# EAGLE board Qwiic_Hall_Effect_Sensor_TMAG5273-Panel (EAGLE 9.6.2), part 1 of 2
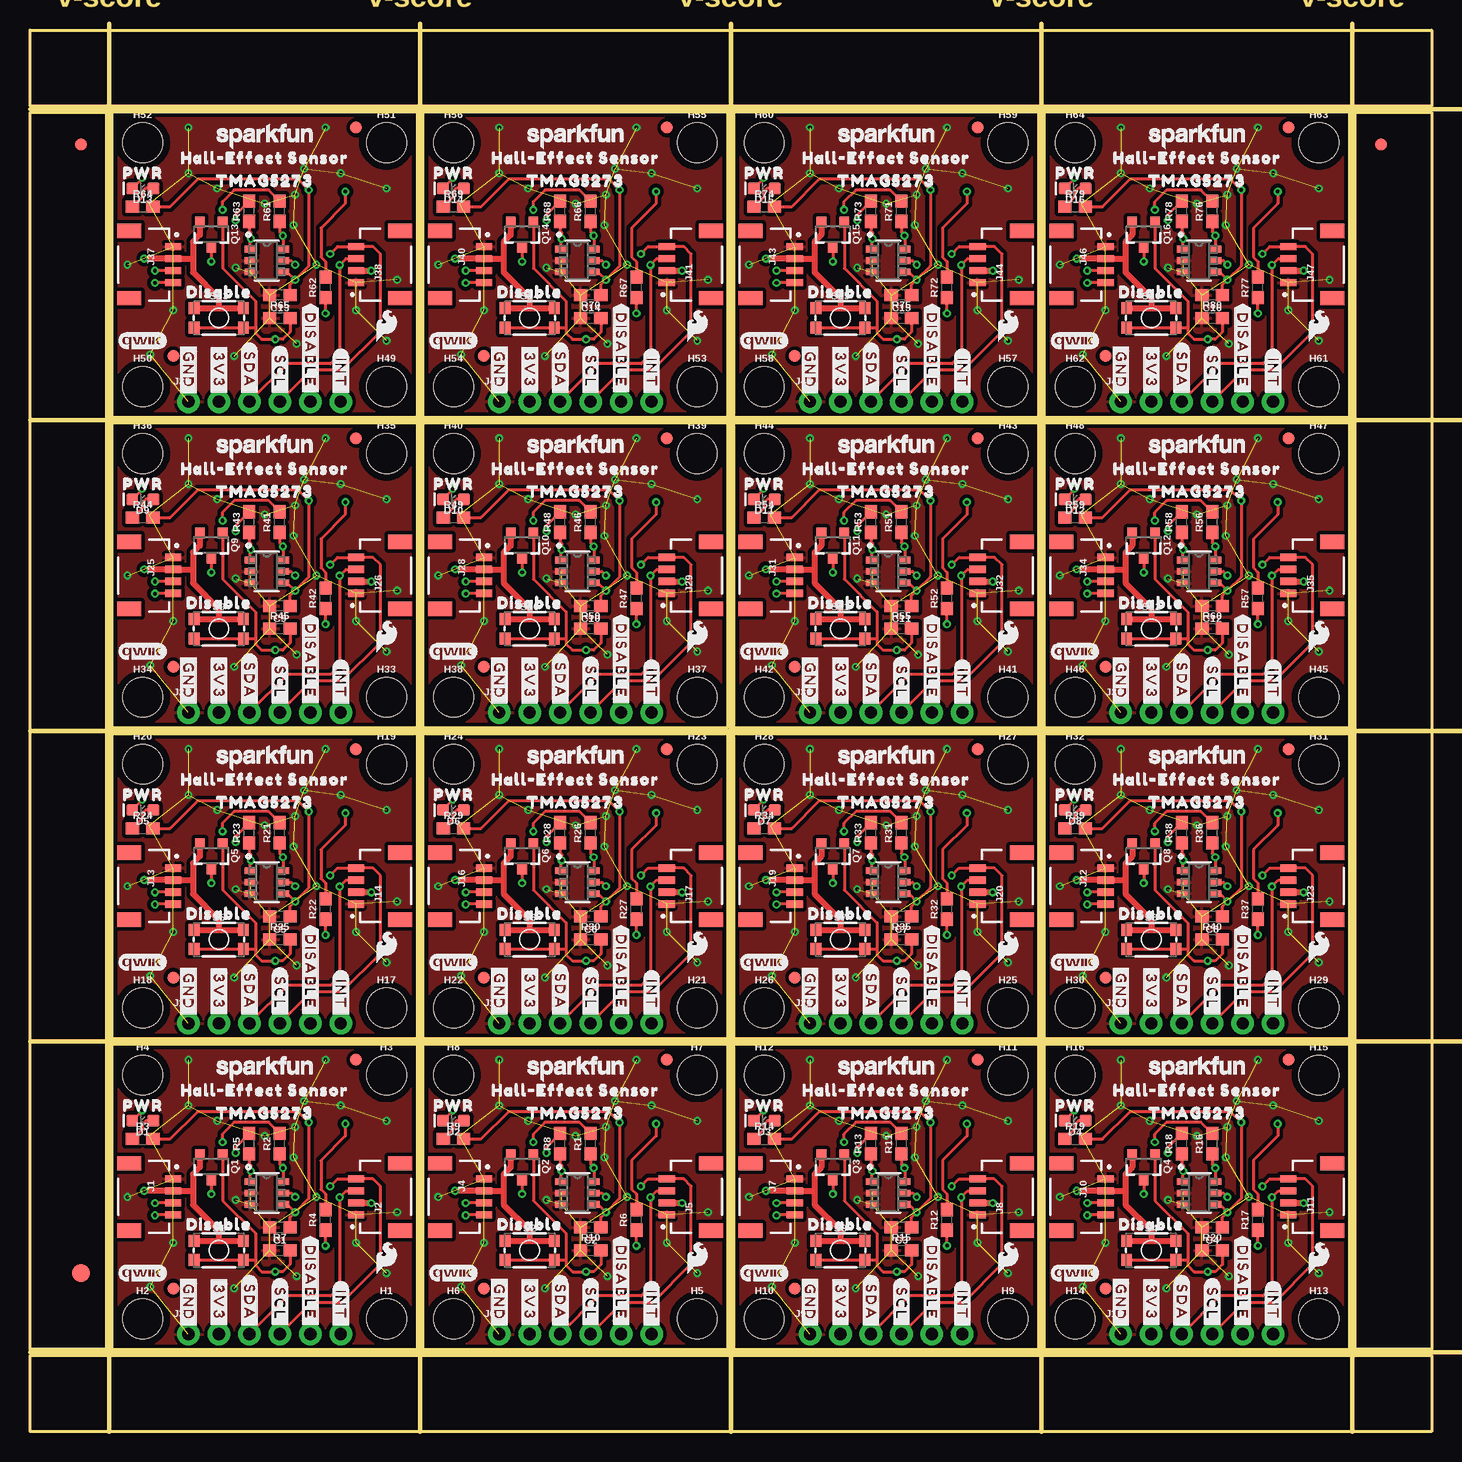
[diagram p0: board, top side]
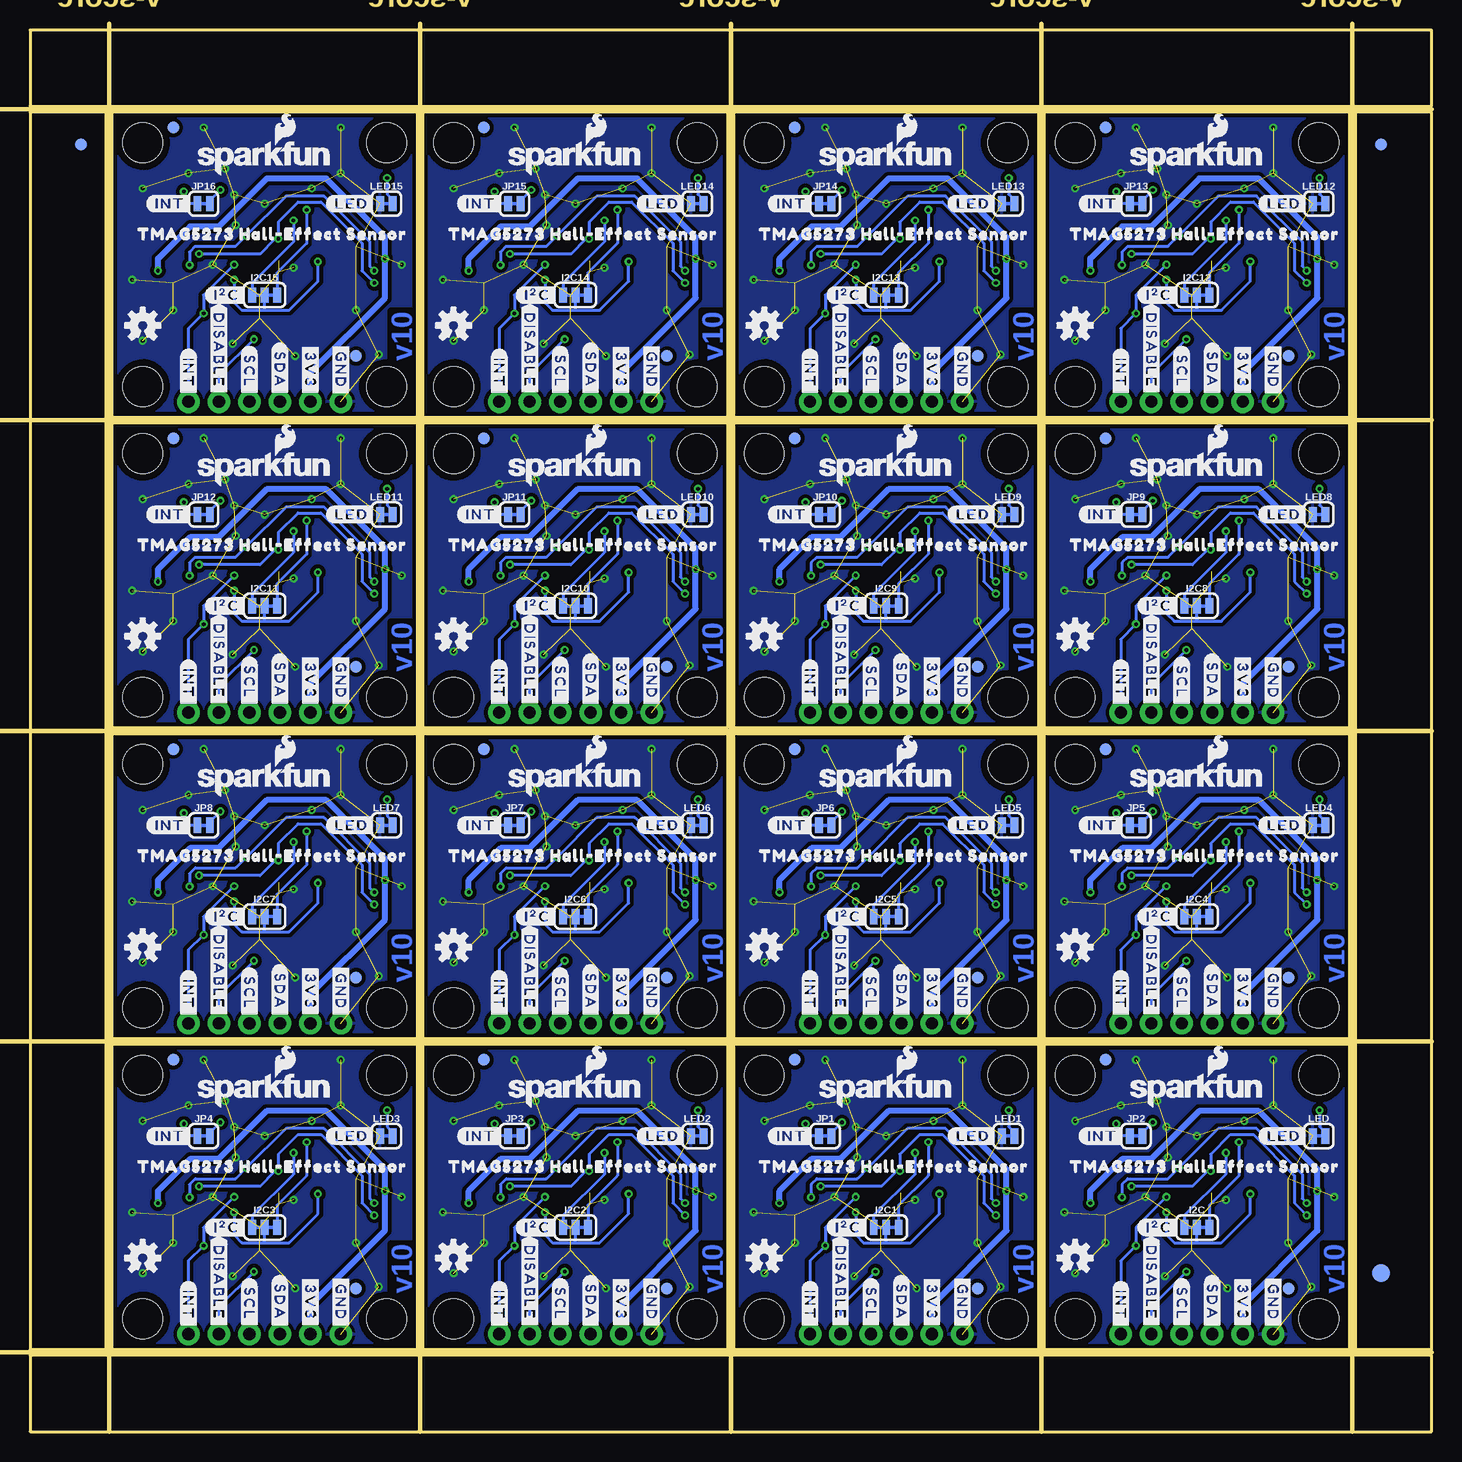
[diagram p1: board, bottom side, seen from below]

Size 116.84 x 116.84 mm. Coordinates in mm from the lower left corner, seen from the top.
Outline: 6.86,6.86 32.26,6.86 32.26,32.26 6.86,32.26 6.86,6.86
Outline: 32.77,6.86 58.17,6.86 58.17,32.26 32.77,32.26 32.77,6.86
Outline: 58.67,6.86 84.07,6.86 84.07,32.26 58.67,32.26 58.67,6.86
Outline: 84.58,6.86 109.98,6.86 109.98,32.26 84.58,32.26 84.58,6.86
Outline: 6.86,32.77 32.26,32.77 32.26,58.17 6.86,58.17 6.86,32.77
Outline: 32.77,32.77 58.17,32.77 58.17,58.17 32.77,58.17 32.77,32.77
Outline: 58.67,32.77 84.07,32.77 84.07,58.17 58.67,58.17 58.67,32.77
Outline: 84.58,32.77 109.98,32.77 109.98,58.17 84.58,58.17 84.58,32.77
Outline: 6.86,58.67 32.26,58.67 32.26,84.07 6.86,84.07 6.86,58.67
Outline: 32.77,58.67 58.17,58.67 58.17,84.07 32.77,84.07 32.77,58.67
Outline: 58.67,58.67 84.07,58.67 84.07,84.07 58.67,84.07 58.67,58.67
Outline: 84.58,58.67 109.98,58.67 109.98,84.07 84.58,84.07 84.58,58.67
Outline: 6.86,84.58 32.26,84.58 32.26,109.98 6.86,109.98 6.86,84.58
Outline: 32.77,84.58 58.17,84.58 58.17,109.98 32.77,109.98 32.77,84.58
Outline: 58.67,84.58 84.07,84.58 84.07,109.98 58.67,109.98 58.67,84.58
Outline: 84.58,84.58 109.98,84.58 109.98,109.98 84.58,109.98 84.58,84.58
Outline: 0,6.35 116.84,6.35 116.84,0 0,0 0,6.35
Outline: 110.49,109.98 116.84,109.98 116.84,6.86 110.49,6.86 110.49,109.98
Outline: 0,116.84 116.84,116.84 116.84,110.49 0,110.49 0,116.84
Outline: 0,109.98 6.35,109.98 6.35,6.86 0,6.86 0,109.98
Copper layers (1*16): Top 0.035mm / dielectric 1.5mm / Bottom 0.035mm
Design rules "Qwiic_Hall_Effect_Sensor_TMAG5273": minimum track width 7mil, minimum drill 0.3mm, track to track 7mil, track to pad 7mil, pad to pad 7mil, via to via 7mil, smd to smd 7mil, copper to edge 7mil, drill to drill 7mil, minimum pad ring 7mil, minimum via ring 7mil, stop-mask expansion 3mil, vias tented up to drill 25mil, thermal gap 10mil
Milling: 10 lines

## Footprints (pad centres in the part's own frame; a part is rotated, then mirrored left to right if it is on the bottom)
0603 = smd 1.1 x 1: 1 -0.85,0; 2 0.85,0
LED-0603 = smd 1 x 1: A -0.877,0; C 0.877,0
FIDUCIAL-1X2 = smd 1 x 1: 1 0,0
FIDUCIAL-1.5X3 = smd 1.5 x 1.5: 1 0,0
STAND-OFF = hole 3.302: 0,0
SMT-JUMPER_3_2-NC_TRACE_SILK = smd 0.66 x 1.27: 1 -1.041,0; 2 0,0; 3 1.041,0
JST04_1MM_RA = smd 0.6 x 1.35: 1 -1.5,0; 2 -0.5,0; 3 0.5,0; 4 1.5,0 | smd 1.2 x 2: NC1 2.8,-3.675; NC2 -2.8,-3.675
1X06_NO_SILK = drill 1.016 pad 1.88: 1 0,0; 2 2.54,0; 3 5.08,0; 4 7.62,0; 5 10.16,0; 6 12.7,0
SMT-JUMPER_2_NC_TRACE_SILK = smd 0.66 x 1.27: 1 -0.521,0; 2 0.521,0
SOT23-3 = smd 0.8 x 0.9: 1 -0.95,-1; 2 0.95,-1; 3 0,1.1
TACTILE_SWITCH_SMD_4.6X2.8MM = smd 0.9 x 1: 1 -2.05,-0.8; 2 2.05,-0.8; 3 2.05,0.8; 4 -2.05,0.8
SOT23-6_DBV_TEX = smd 0.978 x 0.559: 1 -1.365,0.95; 2 -1.365,0; 3 -1.365,-0.95; 4 1.365,-0.95; 5 1.365,0; 6 1.365,0.95

## Placement (x,y rotation side)
C1  0.1uF  [0603]  20.83,17.02 180 top
C2  0.1uF  [0603]  46.74,17.02 180 top
C3  0.1uF  [0603]  72.64,17.02 180 top
C4  0.1uF  [0603]  98.55,17.02 180 top
C5  0.1uF  [0603]  20.83,42.93 180 top
C6  0.1uF  [0603]  46.74,42.93 180 top
C7  0.1uF  [0603]  72.64,42.93 180 top
C8  0.1uF  [0603]  98.55,42.93 180 top
C9  0.1uF  [0603]  20.83,68.83 180 top
C10  0.1uF  [0603]  46.74,68.83 180 top
C11  0.1uF  [0603]  72.64,68.83 180 top
C12  0.1uF  [0603]  98.55,68.83 180 top
C13  0.1uF  [0603]  20.83,94.74 180 top
C14  0.1uF  [0603]  46.74,94.74 180 top
C15  0.1uF  [0603]  72.64,94.74 180 top
C16  0.1uF  [0603]  98.55,94.74 180 top
D1  Red  [LED-0603]  9.4,25.91 180 top
D2  Red  [LED-0603]  35.31,25.91 180 top
D3  Red  [LED-0603]  61.21,25.91 180 top
D4  Red  [LED-0603]  87.12,25.91 180 top
D5  Red  [LED-0603]  9.4,51.82 180 top
D6  Red  [LED-0603]  35.31,51.82 180 top
D7  Red  [LED-0603]  61.21,51.82 180 top
D8  Red  [LED-0603]  87.12,51.82 180 top
D9  Red  [LED-0603]  9.4,77.72 180 top
D10  Red  [LED-0603]  35.31,77.72 180 top
D11  Red  [LED-0603]  61.21,77.72 180 top
D12  Red  [LED-0603]  87.12,77.72 180 top
D13  Red  [LED-0603]  9.4,103.63 180 top
D14  Red  [LED-0603]  35.31,103.63 180 top
D15  Red  [LED-0603]  61.21,103.63 180 top
D16  Red  [LED-0603]  87.12,103.63 180 top
E$1  [FIDUCIAL-1X2]  4.23,107.31 0 top
E$2  [FIDUCIAL-1X2]  4.23,107.31 0 bottom
E$3  [FIDUCIAL-1X2]  112.61,107.31 0 top
E$4  [FIDUCIAL-1X2]  112.61,107.31 0 bottom
E$5  [FIDUCIAL-1.5X3]  4.23,13.21 0 top
E$6  [FIDUCIAL-1.5X3]  4.23,13.21 0 bottom
FD1  FIDUCIAL1X2  [FIDUCIAL-1X2]  11.94,11.94 0 bottom
FD2  FIDUCIAL1X2  [FIDUCIAL-1X2]  11.94,11.94 0 top
FD3  FIDUCIAL1X2  [FIDUCIAL-1X2]  27.18,30.99 0 bottom
FD4  FIDUCIAL1X2  [FIDUCIAL-1X2]  27.18,30.99 0 top
FD5  FIDUCIAL1X2  [FIDUCIAL-1X2]  37.85,11.94 0 bottom
FD6  FIDUCIAL1X2  [FIDUCIAL-1X2]  37.85,11.94 0 top
FD7  FIDUCIAL1X2  [FIDUCIAL-1X2]  53.09,30.99 0 bottom
FD8  FIDUCIAL1X2  [FIDUCIAL-1X2]  53.09,30.99 0 top
FD9  FIDUCIAL1X2  [FIDUCIAL-1X2]  63.75,11.94 0 bottom
FD10  FIDUCIAL1X2  [FIDUCIAL-1X2]  63.75,11.94 0 top
FD11  FIDUCIAL1X2  [FIDUCIAL-1X2]  78.99,30.99 0 bottom
FD12  FIDUCIAL1X2  [FIDUCIAL-1X2]  78.99,30.99 0 top
FD13  FIDUCIAL1X2  [FIDUCIAL-1X2]  89.66,11.94 0 bottom
FD14  FIDUCIAL1X2  [FIDUCIAL-1X2]  89.66,11.94 0 top
FD15  FIDUCIAL1X2  [FIDUCIAL-1X2]  104.9,30.99 0 bottom
FD16  FIDUCIAL1X2  [FIDUCIAL-1X2]  104.9,30.99 0 top
FD17  FIDUCIAL1X2  [FIDUCIAL-1X2]  11.94,37.85 0 bottom
FD18  FIDUCIAL1X2  [FIDUCIAL-1X2]  11.94,37.85 0 top
FD19  FIDUCIAL1X2  [FIDUCIAL-1X2]  27.18,56.9 0 bottom
FD20  FIDUCIAL1X2  [FIDUCIAL-1X2]  27.18,56.9 0 top
FD21  FIDUCIAL1X2  [FIDUCIAL-1X2]  37.85,37.85 0 bottom
FD22  FIDUCIAL1X2  [FIDUCIAL-1X2]  37.85,37.85 0 top
FD23  FIDUCIAL1X2  [FIDUCIAL-1X2]  53.09,56.9 0 bottom
FD24  FIDUCIAL1X2  [FIDUCIAL-1X2]  53.09,56.9 0 top
FD25  FIDUCIAL1X2  [FIDUCIAL-1X2]  63.75,37.85 0 bottom
FD26  FIDUCIAL1X2  [FIDUCIAL-1X2]  63.75,37.85 0 top
FD27  FIDUCIAL1X2  [FIDUCIAL-1X2]  78.99,56.9 0 bottom
FD28  FIDUCIAL1X2  [FIDUCIAL-1X2]  78.99,56.9 0 top
FD29  FIDUCIAL1X2  [FIDUCIAL-1X2]  89.66,37.85 0 bottom
FD30  FIDUCIAL1X2  [FIDUCIAL-1X2]  89.66,37.85 0 top
FD31  FIDUCIAL1X2  [FIDUCIAL-1X2]  104.9,56.9 0 bottom
FD32  FIDUCIAL1X2  [FIDUCIAL-1X2]  104.9,56.9 0 top
FD33  FIDUCIAL1X2  [FIDUCIAL-1X2]  11.94,63.75 0 bottom
FD34  FIDUCIAL1X2  [FIDUCIAL-1X2]  11.94,63.75 0 top
FD35  FIDUCIAL1X2  [FIDUCIAL-1X2]  27.18,82.8 0 bottom
FD36  FIDUCIAL1X2  [FIDUCIAL-1X2]  27.18,82.8 0 top
FD37  FIDUCIAL1X2  [FIDUCIAL-1X2]  37.85,63.75 0 bottom
FD38  FIDUCIAL1X2  [FIDUCIAL-1X2]  37.85,63.75 0 top
FD39  FIDUCIAL1X2  [FIDUCIAL-1X2]  53.09,82.8 0 bottom
FD40  FIDUCIAL1X2  [FIDUCIAL-1X2]  53.09,82.8 0 top
FD41  FIDUCIAL1X2  [FIDUCIAL-1X2]  63.75,63.75 0 bottom
FD42  FIDUCIAL1X2  [FIDUCIAL-1X2]  63.75,63.75 0 top
FD43  FIDUCIAL1X2  [FIDUCIAL-1X2]  78.99,82.8 0 bottom
FD44  FIDUCIAL1X2  [FIDUCIAL-1X2]  78.99,82.8 0 top
FD45  FIDUCIAL1X2  [FIDUCIAL-1X2]  89.66,63.75 0 bottom
FD46  FIDUCIAL1X2  [FIDUCIAL-1X2]  89.66,63.75 0 top
FD47  FIDUCIAL1X2  [FIDUCIAL-1X2]  104.9,82.8 0 bottom
FD48  FIDUCIAL1X2  [FIDUCIAL-1X2]  104.9,82.8 0 top
FD49  FIDUCIAL1X2  [FIDUCIAL-1X2]  11.94,89.66 0 bottom
FD50  FIDUCIAL1X2  [FIDUCIAL-1X2]  11.94,89.66 0 top
FD51  FIDUCIAL1X2  [FIDUCIAL-1X2]  27.18,108.71 0 bottom
FD52  FIDUCIAL1X2  [FIDUCIAL-1X2]  27.18,108.71 0 top
FD53  FIDUCIAL1X2  [FIDUCIAL-1X2]  37.85,89.66 0 bottom
FD54  FIDUCIAL1X2  [FIDUCIAL-1X2]  37.85,89.66 0 top
FD55  FIDUCIAL1X2  [FIDUCIAL-1X2]  53.09,108.71 0 bottom
FD56  FIDUCIAL1X2  [FIDUCIAL-1X2]  53.09,108.71 0 top
FD57  FIDUCIAL1X2  [FIDUCIAL-1X2]  63.75,89.66 0 bottom
FD58  FIDUCIAL1X2  [FIDUCIAL-1X2]  63.75,89.66 0 top
FD59  FIDUCIAL1X2  [FIDUCIAL-1X2]  78.99,108.71 0 bottom
FD60  FIDUCIAL1X2  [FIDUCIAL-1X2]  78.99,108.71 0 top
FD61  FIDUCIAL1X2  [FIDUCIAL-1X2]  89.66,89.66 0 bottom
FD62  FIDUCIAL1X2  [FIDUCIAL-1X2]  89.66,89.66 0 top
FD63  FIDUCIAL1X2  [FIDUCIAL-1X2]  104.9,108.71 0 bottom
FD64  FIDUCIAL1X2  [FIDUCIAL-1X2]  104.9,108.71 0 top
H1  STAND-OFF  [STAND-OFF]  29.72,9.4 0 top
H2  STAND-OFF  [STAND-OFF]  9.4,9.4 0 top
H3  STAND-OFF  [STAND-OFF]  29.72,29.72 0 top
H4  STAND-OFF  [STAND-OFF]  9.4,29.72 0 top
H5  STAND-OFF  [STAND-OFF]  55.63,9.4 0 top
H6  STAND-OFF  [STAND-OFF]  35.31,9.4 0 top
H7  STAND-OFF  [STAND-OFF]  55.63,29.72 0 top
H8  STAND-OFF  [STAND-OFF]  35.31,29.72 0 top
H9  STAND-OFF  [STAND-OFF]  81.53,9.4 0 top
H10  STAND-OFF  [STAND-OFF]  61.21,9.4 0 top
H11  STAND-OFF  [STAND-OFF]  81.53,29.72 0 top
H12  STAND-OFF  [STAND-OFF]  61.21,29.72 0 top
H13  STAND-OFF  [STAND-OFF]  107.44,9.4 0 top
H14  STAND-OFF  [STAND-OFF]  87.12,9.4 0 top
H15  STAND-OFF  [STAND-OFF]  107.44,29.72 0 top
H16  STAND-OFF  [STAND-OFF]  87.12,29.72 0 top
H17  STAND-OFF  [STAND-OFF]  29.72,35.31 0 top
H18  STAND-OFF  [STAND-OFF]  9.4,35.31 0 top
H19  STAND-OFF  [STAND-OFF]  29.72,55.63 0 top
H20  STAND-OFF  [STAND-OFF]  9.4,55.63 0 top
H21  STAND-OFF  [STAND-OFF]  55.63,35.31 0 top
H22  STAND-OFF  [STAND-OFF]  35.31,35.31 0 top
H23  STAND-OFF  [STAND-OFF]  55.63,55.63 0 top
H24  STAND-OFF  [STAND-OFF]  35.31,55.63 0 top
H25  STAND-OFF  [STAND-OFF]  81.53,35.31 0 top
H26  STAND-OFF  [STAND-OFF]  61.21,35.31 0 top
H27  STAND-OFF  [STAND-OFF]  81.53,55.63 0 top
H28  STAND-OFF  [STAND-OFF]  61.21,55.63 0 top
H29  STAND-OFF  [STAND-OFF]  107.44,35.31 0 top
H30  STAND-OFF  [STAND-OFF]  87.12,35.31 0 top
H31  STAND-OFF  [STAND-OFF]  107.44,55.63 0 top
H32  STAND-OFF  [STAND-OFF]  87.12,55.63 0 top
H33  STAND-OFF  [STAND-OFF]  29.72,61.21 0 top
H34  STAND-OFF  [STAND-OFF]  9.4,61.21 0 top
H35  STAND-OFF  [STAND-OFF]  29.72,81.53 0 top
H36  STAND-OFF  [STAND-OFF]  9.4,81.53 0 top
H37  STAND-OFF  [STAND-OFF]  55.63,61.21 0 top
H38  STAND-OFF  [STAND-OFF]  35.31,61.21 0 top
H39  STAND-OFF  [STAND-OFF]  55.63,81.53 0 top
H40  STAND-OFF  [STAND-OFF]  35.31,81.53 0 top
H41  STAND-OFF  [STAND-OFF]  81.53,61.21 0 top
H42  STAND-OFF  [STAND-OFF]  61.21,61.21 0 top
H43  STAND-OFF  [STAND-OFF]  81.53,81.53 0 top
H44  STAND-OFF  [STAND-OFF]  61.21,81.53 0 top
H45  STAND-OFF  [STAND-OFF]  107.44,61.21 0 top
H46  STAND-OFF  [STAND-OFF]  87.12,61.21 0 top
H47  STAND-OFF  [STAND-OFF]  107.44,81.53 0 top
H48  STAND-OFF  [STAND-OFF]  87.12,81.53 0 top
H49  STAND-OFF  [STAND-OFF]  29.72,87.12 0 top
H50  STAND-OFF  [STAND-OFF]  9.4,87.12 0 top
H51  STAND-OFF  [STAND-OFF]  29.72,107.44 0 top
H52  STAND-OFF  [STAND-OFF]  9.4,107.44 0 top
H53  STAND-OFF  [STAND-OFF]  55.63,87.12 0 top
H54  STAND-OFF  [STAND-OFF]  35.31,87.12 0 top
H55  STAND-OFF  [STAND-OFF]  55.63,107.44 0 top
H56  STAND-OFF  [STAND-OFF]  35.31,107.44 0 top
H57  STAND-OFF  [STAND-OFF]  81.53,87.12 0 top
H58  STAND-OFF  [STAND-OFF]  61.21,87.12 0 top
H59  STAND-OFF  [STAND-OFF]  81.53,107.44 0 top
H60  STAND-OFF  [STAND-OFF]  61.21,107.44 0 top
H61  STAND-OFF  [STAND-OFF]  107.44,87.12 0 top
H62  STAND-OFF  [STAND-OFF]  87.12,87.12 0 top
H63  STAND-OFF  [STAND-OFF]  107.44,107.44 0 top
H64  STAND-OFF  [STAND-OFF]  87.12,107.44 0 top
I2C  JUMPER-SMT_3_2-NC_TRACE_SILK  [SMT-JUMPER_3_2-NC_TRACE_SILK]  19.56,17.02 0 bottom
I2C1  JUMPER-SMT_3_2-NC_TRACE_SILK  [SMT-JUMPER_3_2-NC_TRACE_SILK]  45.47,17.02 0 bottom
I2C2  JUMPER-SMT_3_2-NC_TRACE_SILK  [SMT-JUMPER_3_2-NC_TRACE_SILK]  71.37,17.02 0 bottom
I2C3  JUMPER-SMT_3_2-NC_TRACE_SILK  [SMT-JUMPER_3_2-NC_TRACE_SILK]  97.28,17.02 0 bottom
I2C4  JUMPER-SMT_3_2-NC_TRACE_SILK  [SMT-JUMPER_3_2-NC_TRACE_SILK]  19.56,42.93 0 bottom
I2C5  JUMPER-SMT_3_2-NC_TRACE_SILK  [SMT-JUMPER_3_2-NC_TRACE_SILK]  45.47,42.93 0 bottom
I2C6  JUMPER-SMT_3_2-NC_TRACE_SILK  [SMT-JUMPER_3_2-NC_TRACE_SILK]  71.37,42.93 0 bottom
I2C7  JUMPER-SMT_3_2-NC_TRACE_SILK  [SMT-JUMPER_3_2-NC_TRACE_SILK]  97.28,42.93 0 bottom
I2C8  JUMPER-SMT_3_2-NC_TRACE_SILK  [SMT-JUMPER_3_2-NC_TRACE_SILK]  19.56,68.83 0 bottom
I2C9  JUMPER-SMT_3_2-NC_TRACE_SILK  [SMT-JUMPER_3_2-NC_TRACE_SILK]  45.47,68.83 0 bottom
I2C10  JUMPER-SMT_3_2-NC_TRACE_SILK  [SMT-JUMPER_3_2-NC_TRACE_SILK]  71.37,68.83 0 bottom
I2C11  JUMPER-SMT_3_2-NC_TRACE_SILK  [SMT-JUMPER_3_2-NC_TRACE_SILK]  97.28,68.83 0 bottom
I2C12  JUMPER-SMT_3_2-NC_TRACE_SILK  [SMT-JUMPER_3_2-NC_TRACE_SILK]  19.56,94.74 0 bottom
I2C13  JUMPER-SMT_3_2-NC_TRACE_SILK  [SMT-JUMPER_3_2-NC_TRACE_SILK]  45.47,94.74 0 bottom
I2C14  JUMPER-SMT_3_2-NC_TRACE_SILK  [SMT-JUMPER_3_2-NC_TRACE_SILK]  71.37,94.74 0 bottom
I2C15  JUMPER-SMT_3_2-NC_TRACE_SILK  [SMT-JUMPER_3_2-NC_TRACE_SILK]  97.28,94.74 0 bottom
J1  QWIIC_RIGHT_ANGLE  [JST04_1MM_RA]  11.94,19.56 270 top
J2  QWIIC_RIGHT_ANGLE  [JST04_1MM_RA]  27.18,19.56 90 top
J3  [1X06_NO_SILK]  13.21,8.13 0 top
J4  QWIIC_RIGHT_ANGLE  [JST04_1MM_RA]  37.85,19.56 270 top
J5  QWIIC_RIGHT_ANGLE  [JST04_1MM_RA]  53.09,19.56 90 top
J6  [1X06_NO_SILK]  39.12,8.13 0 top
J7  QWIIC_RIGHT_ANGLE  [JST04_1MM_RA]  63.75,19.56 270 top
J8  QWIIC_RIGHT_ANGLE  [JST04_1MM_RA]  78.99,19.56 90 top
J9  [1X06_NO_SILK]  65.02,8.13 0 top
J10  QWIIC_RIGHT_ANGLE  [JST04_1MM_RA]  89.66,19.56 270 top
J11  QWIIC_RIGHT_ANGLE  [JST04_1MM_RA]  104.9,19.56 90 top
J12  [1X06_NO_SILK]  90.93,8.13 0 top
J13  QWIIC_RIGHT_ANGLE  [JST04_1MM_RA]  11.94,45.47 270 top
J14  QWIIC_RIGHT_ANGLE  [JST04_1MM_RA]  27.18,45.47 90 top
J15  [1X06_NO_SILK]  13.21,34.04 0 top
J16  QWIIC_RIGHT_ANGLE  [JST04_1MM_RA]  37.85,45.47 270 top
J17  QWIIC_RIGHT_ANGLE  [JST04_1MM_RA]  53.09,45.47 90 top
J18  [1X06_NO_SILK]  39.12,34.04 0 top
J19  QWIIC_RIGHT_ANGLE  [JST04_1MM_RA]  63.75,45.47 270 top
J20  QWIIC_RIGHT_ANGLE  [JST04_1MM_RA]  78.99,45.47 90 top
J21  [1X06_NO_SILK]  65.02,34.04 0 top
J22  QWIIC_RIGHT_ANGLE  [JST04_1MM_RA]  89.66,45.47 270 top
J23  QWIIC_RIGHT_ANGLE  [JST04_1MM_RA]  104.9,45.47 90 top
J24  [1X06_NO_SILK]  90.93,34.04 0 top
J25  QWIIC_RIGHT_ANGLE  [JST04_1MM_RA]  11.94,71.37 270 top
J26  QWIIC_RIGHT_ANGLE  [JST04_1MM_RA]  27.18,71.37 90 top
J27  [1X06_NO_SILK]  13.21,59.94 0 top
J28  QWIIC_RIGHT_ANGLE  [JST04_1MM_RA]  37.85,71.37 270 top
J29  QWIIC_RIGHT_ANGLE  [JST04_1MM_RA]  53.09,71.37 90 top
J30  [1X06_NO_SILK]  39.12,59.94 0 top
J31  QWIIC_RIGHT_ANGLE  [JST04_1MM_RA]  63.75,71.37 270 top
J32  QWIIC_RIGHT_ANGLE  [JST04_1MM_RA]  78.99,71.37 90 top
J33  [1X06_NO_SILK]  65.02,59.94 0 top
J34  QWIIC_RIGHT_ANGLE  [JST04_1MM_RA]  89.66,71.37 270 top
J35  QWIIC_RIGHT_ANGLE  [JST04_1MM_RA]  104.9,71.37 90 top
J36  [1X06_NO_SILK]  90.93,59.94 0 top
J37  QWIIC_RIGHT_ANGLE  [JST04_1MM_RA]  11.94,97.28 270 top
J38  QWIIC_RIGHT_ANGLE  [JST04_1MM_RA]  27.18,97.28 90 top
J39  [1X06_NO_SILK]  13.21,85.85 0 top
J40  QWIIC_RIGHT_ANGLE  [JST04_1MM_RA]  37.85,97.28 270 top
J41  QWIIC_RIGHT_ANGLE  [JST04_1MM_RA]  53.09,97.28 90 top
J42  [1X06_NO_SILK]  39.12,85.85 0 top
J43  QWIIC_RIGHT_ANGLE  [JST04_1MM_RA]  63.75,97.28 270 top
J44  QWIIC_RIGHT_ANGLE  [JST04_1MM_RA]  78.99,97.28 90 top
J45  [1X06_NO_SILK]  65.02,85.85 0 top
J46  QWIIC_RIGHT_ANGLE  [JST04_1MM_RA]  89.66,97.28 270 top
J47  QWIIC_RIGHT_ANGLE  [JST04_1MM_RA]  104.9,97.28 90 top
J48  [1X06_NO_SILK]  90.93,85.85 0 top
JP1  JUMPER-SMT_2_NC_TRACE_SILK  [SMT-JUMPER_2_NC_TRACE_SILK]  50.55,24.64 0 bottom
JP2  JUMPER-SMT_2_NC_TRACE_SILK  [SMT-JUMPER_2_NC_TRACE_SILK]  24.64,24.64 0 bottom
JP3  JUMPER-SMT_2_NC_TRACE_SILK  [SMT-JUMPER_2_NC_TRACE_SILK]  76.45,24.64 0 bottom
JP4  JUMPER-SMT_2_NC_TRACE_SILK  [SMT-JUMPER_2_NC_TRACE_SILK]  102.36,24.64 0 bottom
JP5  JUMPER-SMT_2_NC_TRACE_SILK  [SMT-JUMPER_2_NC_TRACE_SILK]  24.64,50.55 0 bottom
JP6  JUMPER-SMT_2_NC_TRACE_SILK  [SMT-JUMPER_2_NC_TRACE_SILK]  50.55,50.55 0 bottom
JP7  JUMPER-SMT_2_NC_TRACE_SILK  [SMT-JUMPER_2_NC_TRACE_SILK]  76.45,50.55 0 bottom
JP8  JUMPER-SMT_2_NC_TRACE_SILK  [SMT-JUMPER_2_NC_TRACE_SILK]  102.36,50.55 0 bottom
JP9  JUMPER-SMT_2_NC_TRACE_SILK  [SMT-JUMPER_2_NC_TRACE_SILK]  24.64,76.45 0 bottom
JP10  JUMPER-SMT_2_NC_TRACE_SILK  [SMT-JUMPER_2_NC_TRACE_SILK]  50.55,76.45 0 bottom
JP11  JUMPER-SMT_2_NC_TRACE_SILK  [SMT-JUMPER_2_NC_TRACE_SILK]  76.45,76.45 0 bottom
JP12  JUMPER-SMT_2_NC_TRACE_SILK  [SMT-JUMPER_2_NC_TRACE_SILK]  102.36,76.45 0 bottom
JP13  JUMPER-SMT_2_NC_TRACE_SILK  [SMT-JUMPER_2_NC_TRACE_SILK]  24.64,102.36 0 bottom
JP14  JUMPER-SMT_2_NC_TRACE_SILK  [SMT-JUMPER_2_NC_TRACE_SILK]  50.55,102.36 0 bottom
JP15  JUMPER-SMT_2_NC_TRACE_SILK  [SMT-JUMPER_2_NC_TRACE_SILK]  76.45,102.36 0 bottom
JP16  JUMPER-SMT_2_NC_TRACE_SILK  [SMT-JUMPER_2_NC_TRACE_SILK]  102.36,102.36 0 bottom
LED  JUMPER-SMT_2_NC_TRACE_SILK  [SMT-JUMPER_2_NC_TRACE_SILK]  9.4,24.64 0 bottom
LED1  JUMPER-SMT_2_NC_TRACE_SILK  [SMT-JUMPER_2_NC_TRACE_SILK]  35.31,24.64 0 bottom
LED2  JUMPER-SMT_2_NC_TRACE_SILK  [SMT-JUMPER_2_NC_TRACE_SILK]  61.21,24.64 0 bottom
LED3  JUMPER-SMT_2_NC_TRACE_SILK  [SMT-JUMPER_2_NC_TRACE_SILK]  87.12,24.64 0 bottom
LED4  JUMPER-SMT_2_NC_TRACE_SILK  [SMT-JUMPER_2_NC_TRACE_SILK]  9.4,50.55 0 bottom
LED5  JUMPER-SMT_2_NC_TRACE_SILK  [SMT-JUMPER_2_NC_TRACE_SILK]  35.31,50.55 0 bottom
LED6  JUMPER-SMT_2_NC_TRACE_SILK  [SMT-JUMPER_2_NC_TRACE_SILK]  61.21,50.55 0 bottom
LED7  JUMPER-SMT_2_NC_TRACE_SILK  [SMT-JUMPER_2_NC_TRACE_SILK]  87.12,50.55 0 bottom
LED8  JUMPER-SMT_2_NC_TRACE_SILK  [SMT-JUMPER_2_NC_TRACE_SILK]  9.4,76.45 0 bottom
LED9  JUMPER-SMT_2_NC_TRACE_SILK  [SMT-JUMPER_2_NC_TRACE_SILK]  35.31,76.45 0 bottom
LED10  JUMPER-SMT_2_NC_TRACE_SILK  [SMT-JUMPER_2_NC_TRACE_SILK]  61.21,76.45 0 bottom
LED11  JUMPER-SMT_2_NC_TRACE_SILK  [SMT-JUMPER_2_NC_TRACE_SILK]  87.12,76.45 0 bottom
LED12  JUMPER-SMT_2_NC_TRACE_SILK  [SMT-JUMPER_2_NC_TRACE_SILK]  9.4,102.36 0 bottom
LED13  JUMPER-SMT_2_NC_TRACE_SILK  [SMT-JUMPER_2_NC_TRACE_SILK]  35.31,102.36 0 bottom
LED14  JUMPER-SMT_2_NC_TRACE_SILK  [SMT-JUMPER_2_NC_TRACE_SILK]  61.21,102.36 0 bottom
LED15  JUMPER-SMT_2_NC_TRACE_SILK  [SMT-JUMPER_2_NC_TRACE_SILK]  87.12,102.36 0 bottom
LOGO1  OSHW-LOGOS  [OSHW-LOGO-S]  29.72,14.48 0 bottom
LOGO2  SFE_LOGO_NAME_FLAME.1_INCH  [SFE_LOGO_NAME_FLAME_.1]  19.56,28.45 0 bottom
LOGO3  QWIIC_LOGO_4MM  [QWIIC_4MM]  9.4,13.21 0 top
LOGO4  SFE_LOGO_NAME8_MM  [SFE_LOGO_NAME_8MM]  19.56,30.35 0 top
LOGO5  OSHW-LOGOS  [OSHW-LOGO-S]  55.63,14.48 0 bottom
LOGO6  SFE_LOGO_FLAME.1_INCH  [SFE_LOGO_FLAME_.1]  29.72,14.48 0 top
LOGO7  SFE_LOGO_NAME_FLAME.1_INCH  [SFE_LOGO_NAME_FLAME_.1]  45.47,28.45 0 bottom
LOGO8  QWIIC_LOGO_4MM  [QWIIC_4MM]  35.31,13.21 0 top
LOGO9  SFE_LOGO_NAME8_MM  [SFE_LOGO_NAME_8MM]  45.47,30.35 0 top
LOGO10  SFE_LOGO_FLAME.1_INCH  [SFE_LOGO_FLAME_.1]  55.63,14.48 0 top
LOGO11  OSHW-LOGOS  [OSHW-LOGO-S]  81.53,14.48 0 bottom
LOGO12  SFE_LOGO_NAME_FLAME.1_INCH  [SFE_LOGO_NAME_FLAME_.1]  71.37,28.45 0 bottom
LOGO13  QWIIC_LOGO_4MM  [QWIIC_4MM]  61.21,13.21 0 top
LOGO14  SFE_LOGO_NAME8_MM  [SFE_LOGO_NAME_8MM]  71.37,30.35 0 top
LOGO15  SFE_LOGO_FLAME.1_INCH  [SFE_LOGO_FLAME_.1]  81.53,14.48 0 top
LOGO16  OSHW-LOGOS  [OSHW-LOGO-S]  107.44,14.48 0 bottom
LOGO17  SFE_LOGO_NAME_FLAME.1_INCH  [SFE_LOGO_NAME_FLAME_.1]  97.28,28.45 0 bottom
LOGO18  QWIIC_LOGO_4MM  [QWIIC_4MM]  87.12,13.21 0 top
LOGO19  SFE_LOGO_NAME8_MM  [SFE_LOGO_NAME_8MM]  97.28,30.35 0 top
LOGO20  SFE_LOGO_FLAME.1_INCH  [SFE_LOGO_FLAME_.1]  107.44,14.48 0 top
LOGO21  OSHW-LOGOS  [OSHW-LOGO-S]  29.72,40.39 0 bottom
LOGO22  SFE_LOGO_NAME_FLAME.1_INCH  [SFE_LOGO_NAME_FLAME_.1]  19.56,54.36 0 bottom
LOGO23  QWIIC_LOGO_4MM  [QWIIC_4MM]  9.4,39.12 0 top
LOGO24  SFE_LOGO_NAME8_MM  [SFE_LOGO_NAME_8MM]  19.56,56.26 0 top
LOGO25  SFE_LOGO_FLAME.1_INCH  [SFE_LOGO_FLAME_.1]  29.72,40.39 0 top
LOGO26  OSHW-LOGOS  [OSHW-LOGO-S]  55.63,40.39 0 bottom
LOGO27  SFE_LOGO_NAME_FLAME.1_INCH  [SFE_LOGO_NAME_FLAME_.1]  45.47,54.36 0 bottom
LOGO28  QWIIC_LOGO_4MM  [QWIIC_4MM]  35.31,39.12 0 top
LOGO29  SFE_LOGO_NAME8_MM  [SFE_LOGO_NAME_8MM]  45.47,56.26 0 top
LOGO30  SFE_LOGO_FLAME.1_INCH  [SFE_LOGO_FLAME_.1]  55.63,40.39 0 top
LOGO31  OSHW-LOGOS  [OSHW-LOGO-S]  81.53,40.39 0 bottom
LOGO32  SFE_LOGO_NAME_FLAME.1_INCH  [SFE_LOGO_NAME_FLAME_.1]  71.37,54.36 0 bottom
LOGO33  QWIIC_LOGO_4MM  [QWIIC_4MM]  61.21,39.12 0 top
LOGO34  SFE_LOGO_NAME8_MM  [SFE_LOGO_NAME_8MM]  71.37,56.26 0 top
LOGO35  SFE_LOGO_FLAME.1_INCH  [SFE_LOGO_FLAME_.1]  81.53,40.39 0 top
LOGO36  OSHW-LOGOS  [OSHW-LOGO-S]  107.44,40.39 0 bottom
LOGO37  SFE_LOGO_NAME_FLAME.1_INCH  [SFE_LOGO_NAME_FLAME_.1]  97.28,54.36 0 bottom
LOGO38  QWIIC_LOGO_4MM  [QWIIC_4MM]  87.12,39.12 0 top
LOGO39  SFE_LOGO_NAME8_MM  [SFE_LOGO_NAME_8MM]  97.28,56.26 0 top
LOGO40  SFE_LOGO_FLAME.1_INCH  [SFE_LOGO_FLAME_.1]  107.44,40.39 0 top
LOGO41  OSHW-LOGOS  [OSHW-LOGO-S]  29.72,66.29 0 bottom
LOGO42  SFE_LOGO_NAME_FLAME.1_INCH  [SFE_LOGO_NAME_FLAME_.1]  19.56,80.26 0 bottom
LOGO43  QWIIC_LOGO_4MM  [QWIIC_4MM]  9.4,65.02 0 top
LOGO44  SFE_LOGO_NAME8_MM  [SFE_LOGO_NAME_8MM]  19.56,82.17 0 top
LOGO45  SFE_LOGO_FLAME.1_INCH  [SFE_LOGO_FLAME_.1]  29.72,66.29 0 top
LOGO46  OSHW-LOGOS  [OSHW-LOGO-S]  55.63,66.29 0 bottom
LOGO47  SFE_LOGO_NAME_FLAME.1_INCH  [SFE_LOGO_NAME_FLAME_.1]  45.47,80.26 0 bottom
LOGO48  QWIIC_LOGO_4MM  [QWIIC_4MM]  35.31,65.02 0 top
LOGO49  SFE_LOGO_NAME8_MM  [SFE_LOGO_NAME_8MM]  45.47,82.17 0 top
LOGO50  SFE_LOGO_FLAME.1_INCH  [SFE_LOGO_FLAME_.1]  55.63,66.29 0 top
LOGO51  OSHW-LOGOS  [OSHW-LOGO-S]  81.53,66.29 0 bottom
LOGO52  SFE_LOGO_NAME_FLAME.1_INCH  [SFE_LOGO_NAME_FLAME_.1]  71.37,80.26 0 bottom
LOGO53  QWIIC_LOGO_4MM  [QWIIC_4MM]  61.21,65.02 0 top
LOGO54  SFE_LOGO_NAME8_MM  [SFE_LOGO_NAME_8MM]  71.37,82.17 0 top
LOGO55  SFE_LOGO_FLAME.1_INCH  [SFE_LOGO_FLAME_.1]  81.53,66.29 0 top
LOGO56  OSHW-LOGOS  [OSHW-LOGO-S]  107.44,66.29 0 bottom
LOGO57  SFE_LOGO_NAME_FLAME.1_INCH  [SFE_LOGO_NAME_FLAME_.1]  97.28,80.26 0 bottom
LOGO58  QWIIC_LOGO_4MM  [QWIIC_4MM]  87.12,65.02 0 top
LOGO59  SFE_LOGO_NAME8_MM  [SFE_LOGO_NAME_8MM]  97.28,82.17 0 top
LOGO60  SFE_LOGO_FLAME.1_INCH  [SFE_LOGO_FLAME_.1]  107.44,66.29 0 top
LOGO61  OSHW-LOGOS  [OSHW-LOGO-S]  29.72,92.2 0 bottom
LOGO62  SFE_LOGO_NAME_FLAME.1_INCH  [SFE_LOGO_NAME_FLAME_.1]  19.56,106.17 0 bottom
LOGO63  QWIIC_LOGO_4MM  [QWIIC_4MM]  9.4,90.93 0 top
LOGO64  SFE_LOGO_NAME8_MM  [SFE_LOGO_NAME_8MM]  19.56,108.08 0 top
LOGO65  SFE_LOGO_FLAME.1_INCH  [SFE_LOGO_FLAME_.1]  29.72,92.2 0 top
LOGO66  OSHW-LOGOS  [OSHW-LOGO-S]  55.63,92.2 0 bottom
LOGO67  SFE_LOGO_NAME_FLAME.1_INCH  [SFE_LOGO_NAME_FLAME_.1]  45.47,106.17 0 bottom
LOGO68  QWIIC_LOGO_4MM  [QWIIC_4MM]  35.31,90.93 0 top
LOGO69  SFE_LOGO_NAME8_MM  [SFE_LOGO_NAME_8MM]  45.47,108.08 0 top
LOGO70  SFE_LOGO_FLAME.1_INCH  [SFE_LOGO_FLAME_.1]  55.63,92.2 0 top
LOGO71  OSHW-LOGOS  [OSHW-LOGO-S]  81.53,92.2 0 bottom
LOGO72  SFE_LOGO_NAME_FLAME.1_INCH  [SFE_LOGO_NAME_FLAME_.1]  71.37,106.17 0 bottom
LOGO73  QWIIC_LOGO_4MM  [QWIIC_4MM]  61.21,90.93 0 top
LOGO74  SFE_LOGO_NAME8_MM  [SFE_LOGO_NAME_8MM]  71.37,108.08 0 top
LOGO75  SFE_LOGO_FLAME.1_INCH  [SFE_LOGO_FLAME_.1]  81.53,92.2 0 top
LOGO76  OSHW-LOGOS  [OSHW-LOGO-S]  107.44,92.2 0 bottom
LOGO77  SFE_LOGO_NAME_FLAME.1_INCH  [SFE_LOGO_NAME_FLAME_.1]  97.28,106.17 0 bottom
LOGO78  QWIIC_LOGO_4MM  [QWIIC_4MM]  87.12,90.93 0 top
LOGO79  SFE_LOGO_NAME8_MM  [SFE_LOGO_NAME_8MM]  97.28,108.08 0 top
LOGO80  SFE_LOGO_FLAME.1_INCH  [SFE_LOGO_FLAME_.1]  107.44,92.2 0 top
Q1  20V/4.2A/52mΩ/1.4W  [SOT23-3]  15.11,22.1 180 top
Q2  20V/4.2A/52mΩ/1.4W  [SOT23-3]  41.02,22.1 180 top
Q3  20V/4.2A/52mΩ/1.4W  [SOT23-3]  66.93,22.1 180 top
Q4  20V/4.2A/52mΩ/1.4W  [SOT23-3]  92.84,22.1 180 top
Q5  20V/4.2A/52mΩ/1.4W  [SOT23-3]  15.11,48.01 180 top
Q6  20V/4.2A/52mΩ/1.4W  [SOT23-3]  41.02,48.01 180 top
Q7  20V/4.2A/52mΩ/1.4W  [SOT23-3]  66.93,48.01 180 top
Q8  20V/4.2A/52mΩ/1.4W  [SOT23-3]  92.84,48.01 180 top
Q9  20V/4.2A/52mΩ/1.4W  [SOT23-3]  15.11,73.91 180 top
Q10  20V/4.2A/52mΩ/1.4W  [SOT23-3]  41.02,73.91 180 top
Q11  20V/4.2A/52mΩ/1.4W  [SOT23-3]  66.93,73.91 180 top
Q12  20V/4.2A/52mΩ/1.4W  [SOT23-3]  92.84,73.91 180 top
Q13  20V/4.2A/52mΩ/1.4W  [SOT23-3]  15.11,99.82 180 top
Q14  20V/4.2A/52mΩ/1.4W  [SOT23-3]  41.02,99.82 180 top
Q15  20V/4.2A/52mΩ/1.4W  [SOT23-3]  66.93,99.82 180 top
Q16  20V/4.2A/52mΩ/1.4W  [SOT23-3]  92.84,99.82 180 top
R1  2.2k  [0603]  46.74,24 90 top
R2  2.2k  [0603]  20.83,24 90 top
R3  4.7k  [0603]  9.4,24.38 0 top
R4  10k  [0603]  24.64,17.65 90 top
R5  2.2k  [0603]  18.29,24 90 top
R6  10k  [0603]  50.55,17.65 90 top
R7  10k  [0603]  20.83,15.11 0 top
R8  2.2k  [0603]  44.2,24 90 top
R9  4.7k  [0603]  35.31,24.38 0 top
R10  10k  [0603]  46.74,15.11 0 top
R11  2.2k  [0603]  72.64,24 90 top
R12  10k  [0603]  76.45,17.65 90 top
R13  2.2k  [0603]  70.1,24 90 top
R14  4.7k  [0603]  61.21,24.38 0 top
R15  10k  [0603]  72.64,15.11 0 top
R16  2.2k  [0603]  98.55,24 90 top
R17  10k  [0603]  102.36,17.65 90 top
R18  2.2k  [0603]  96.01,24 90 top
R19  4.7k  [0603]  87.12,24.38 0 top
R20  10k  [0603]  98.55,15.11 0 top
R21  2.2k  [0603]  20.83,49.91 90 top
R22  10k  [0603]  24.64,43.56 90 top
R23  2.2k  [0603]  18.29,49.91 90 top
R24  4.7k  [0603]  9.4,50.29 0 top
R25  10k  [0603]  20.83,41.02 0 top
R26  2.2k  [0603]  46.74,49.91 90 top
R27  10k  [0603]  50.55,43.56 90 top
R28  2.2k  [0603]  44.2,49.91 90 top
R29  4.7k  [0603]  35.31,50.29 0 top
R30  10k  [0603]  46.74,41.02 0 top
R31  2.2k  [0603]  72.64,49.91 90 top
R32  10k  [0603]  76.45,43.56 90 top
R33  2.2k  [0603]  70.1,49.91 90 top
R34  4.7k  [0603]  61.21,50.29 0 top
R35  10k  [0603]  72.64,41.02 0 top
R36  2.2k  [0603]  98.55,49.91 90 top
R37  10k  [0603]  102.36,43.56 90 top
R38  2.2k  [0603]  96.01,49.91 90 top
R39  4.7k  [0603]  87.12,50.29 0 top
R40  10k  [0603]  98.55,41.02 0 top
R41  2.2k  [0603]  20.83,75.82 90 top
R42  10k  [0603]  24.64,69.47 90 top
R43  2.2k  [0603]  18.29,75.82 90 top
R44  4.7k  [0603]  9.4,76.2 0 top
R45  10k  [0603]  20.83,66.93 0 top
R46  2.2k  [0603]  46.74,75.82 90 top
R47  10k  [0603]  50.55,69.47 90 top
R48  2.2k  [0603]  44.2,75.82 90 top
R49  4.7k  [0603]  35.31,76.2 0 top
R50  10k  [0603]  46.74,66.93 0 top
R51  2.2k  [0603]  72.64,75.82 90 top
R52  10k  [0603]  76.45,69.47 90 top
R53  2.2k  [0603]  70.1,75.82 90 top
R54  4.7k  [0603]  61.21,76.2 0 top
R55  10k  [0603]  72.64,66.93 0 top
R56  2.2k  [0603]  98.55,75.82 90 top
R57  10k  [0603]  102.36,69.47 90 top
R58  2.2k  [0603]  96.01,75.82 90 top
R59  4.7k  [0603]  87.12,76.2 0 top
R60  10k  [0603]  98.55,66.93 0 top
R61  2.2k  [0603]  20.83,101.73 90 top
R62  10k  [0603]  24.64,95.38 90 top
R63  2.2k  [0603]  18.29,101.73 90 top
R64  4.7k  [0603]  9.4,102.11 0 top
R65  10k  [0603]  20.83,92.84 0 top
R66  2.2k  [0603]  46.74,101.73 90 top
R67  10k  [0603]  50.55,95.38 90 top
R68  2.2k  [0603]  44.2,101.73 90 top
R69  4.7k  [0603]  35.31,102.11 0 top
R70  10k  [0603]  46.74,92.84 0 top
R71  2.2k  [0603]  72.64,101.73 90 top
R72  10k  [0603]  76.45,95.38 90 top
R73  2.2k  [0603]  70.1,101.73 90 top
R74  4.7k  [0603]  61.21,102.11 0 top
R75  10k  [0603]  72.64,92.84 0 top
R76  2.2k  [0603]  98.55,101.73 90 top
R77  10k  [0603]  102.36,95.38 90 top
R78  2.2k  [0603]  96.01,101.73 90 top
R79  4.7k  [0603]  87.12,102.11 0 top
R80  10k  [0603]  98.55,92.84 0 top
S1  [TACTILE_SWITCH_SMD_4.6X2.8MM]  15.75,15.11 0 top
S2  [TACTILE_SWITCH_SMD_4.6X2.8MM]  41.66,15.11 0 top
S3  [TACTILE_SWITCH_SMD_4.6X2.8MM]  67.56,15.11 0 top
S4  [TACTILE_SWITCH_SMD_4.6X2.8MM]  93.47,15.11 0 top
S5  [TACTILE_SWITCH_SMD_4.6X2.8MM]  15.75,41.02 0 top
S6  [TACTILE_SWITCH_SMD_4.6X2.8MM]  41.66,41.02 0 top
S7  [TACTILE_SWITCH_SMD_4.6X2.8MM]  67.56,41.02 0 top
S8  [TACTILE_SWITCH_SMD_4.6X2.8MM]  93.47,41.02 0 top
S9  [TACTILE_SWITCH_SMD_4.6X2.8MM]  15.75,66.93 0 top
S10  [TACTILE_SWITCH_SMD_4.6X2.8MM]  41.66,66.93 0 top
S11  [TACTILE_SWITCH_SMD_4.6X2.8MM]  67.56,66.93 0 top
S12  [TACTILE_SWITCH_SMD_4.6X2.8MM]  93.47,66.93 0 top
S13  [TACTILE_SWITCH_SMD_4.6X2.8MM]  15.75,92.84 0 top
S14  [TACTILE_SWITCH_SMD_4.6X2.8MM]  41.66,92.84 0 top
S15  [TACTILE_SWITCH_SMD_4.6X2.8MM]  67.56,92.84 0 top
S16  [TACTILE_SWITCH_SMD_4.6X2.8MM]  93.47,92.84 0 top
U1  TMAG5273  [SOT23-6_DBV_TEX]  19.74,19.89 0 top
U2  TMAG5273  [SOT23-6_DBV_TEX]  45.64,19.89 0 top
U3  TMAG5273  [SOT23-6_DBV_TEX]  71.55,19.89 0 top
U4  TMAG5273  [SOT23-6_DBV_TEX]  97.46,19.89 0 top
U5  TMAG5273  [SOT23-6_DBV_TEX]  19.74,45.8 0 top
U6  TMAG5273  [SOT23-6_DBV_TEX]  45.64,45.8 0 top
U7  TMAG5273  [SOT23-6_DBV_TEX]  71.55,45.8 0 top
U8  TMAG5273  [SOT23-6_DBV_TEX]  97.46,45.8 0 top
U9  TMAG5273  [SOT23-6_DBV_TEX]  19.74,71.7 0 top
U10  TMAG5273  [SOT23-6_DBV_TEX]  45.64,71.7 0 top
U11  TMAG5273  [SOT23-6_DBV_TEX]  71.55,71.7 0 top
U12  TMAG5273  [SOT23-6_DBV_TEX]  97.46,71.7 0 top
U13  TMAG5273  [SOT23-6_DBV_TEX]  19.74,97.61 0 top
U14  TMAG5273  [SOT23-6_DBV_TEX]  45.64,97.61 0 top
U15  TMAG5273  [SOT23-6_DBV_TEX]  71.55,97.61 0 top
U16  TMAG5273  [SOT23-6_DBV_TEX]  97.46,97.61 0 top
U$1  [#3V3#37]  15.75,10.79 270 top
U$2  [#GND#36]  13.21,10.79 270 top
U$3  [#SDA#37]  18.29,10.79 270 top
U$4  [#SCL#38]  20.83,10.67 270 top
U$5  [#INT#5285]  25.91,10.54 270 top
U$6  [#INT#5289]  27.43,24.64 0 bottom
U$7  [PWR41]  9.4,27.18 0 top
U$8  [#LED#42]  12.32,24.64 0 bottom
U$9  [#DISABLE#5290]  23.37,12.45 270 top
U$10  [#I�C#0]  24.51,17.02 0 bottom
U$11  [HALL#EFFECT_SENSOR45]  19.56,28.45 0 top
U$12  [TMAG527346]  19.56,26.54 0 top
U$13  [DISABLE5281]  15.75,17.27 0 top
U$14  [#SDA#5280]  18.29,10.79 270 bottom
U$15  [#DISABLE#5290]  23.37,12.45 270 bottom
U$16  [#SCL#5281]  20.83,10.67 270 bottom
U$17  [#INT#5285]  25.91,10.54 270 bottom
U$18  [#3V3#0]  15.75,10.79 270 bottom
U$19  [#GND#4]  13.21,10.79 270 bottom
U$20  [TMAG5273_HALL#EFFECT_SENSOR5]  18.92,22.1 0 bottom
U$21  [#GND#36]  39.12,10.79 270 top
U$22  [#3V3#37]  41.66,10.79 270 top
U$23  [#SDA#37]  44.2,10.79 270 top
U$24  [#SCL#38]  46.74,10.67 270 top
U$25  [PWR41]  35.31,27.18 0 top
U$26  [#LED#42]  38.23,24.64 0 bottom
U$27  [#I�C#0]  50.42,17.02 0 bottom
U$28  [HALL#EFFECT_SENSOR45]  45.47,28.45 0 top
U$29  [TMAG527346]  45.47,26.54 0 top
U$30  [#SDA#5280]  44.2,10.79 270 bottom
U$31  [#SCL#5281]  46.74,10.67 270 bottom
U$32  [#3V3#0]  41.66,10.79 270 bottom
U$33  [#GND#4]  39.12,10.79 270 bottom
U$34  [TMAG5273_HALL#EFFECT_SENSOR5]  44.83,22.1 0 bottom
U$35  [DISABLE5281]  41.66,17.27 0 top
U$36  [#INT#5285]  51.82,10.54 270 top
U$37  [#INT#5285]  51.82,10.54 270 bottom
U$38  [#INT#5289]  53.34,24.64 0 bottom
U$39  [#DISABLE#5290]  49.28,12.45 270 top
U$40  [#DISABLE#5290]  49.28,12.45 270 bottom
U$41  [#GND#36]  65.02,10.79 270 top
U$42  [#3V3#37]  67.56,10.79 270 top
U$43  [#SDA#37]  70.1,10.79 270 top
U$44  [#SCL#38]  72.64,10.67 270 top
U$45  [PWR41]  61.21,27.18 0 top
U$46  [#LED#42]  64.14,24.64 0 bottom
U$47  [#I�C#0]  76.33,17.02 0 bottom
U$48  [HALL#EFFECT_SENSOR45]  71.37,28.45 0 top
U$49  [TMAG527346]  71.37,26.54 0 top
U$50  [#SDA#5280]  70.1,10.79 270 bottom
U$51  [#SCL#5281]  72.64,10.67 270 bottom
U$52  [#3V3#0]  67.56,10.79 270 bottom
U$53  [#GND#4]  65.02,10.79 270 bottom
U$54  [TMAG5273_HALL#EFFECT_SENSOR5]  70.74,22.1 0 bottom
U$55  [DISABLE5281]  67.56,17.27 0 top
U$56  [#INT#5285]  77.72,10.54 270 top
U$57  [#INT#5285]  77.72,10.54 270 bottom
U$58  [#INT#5289]  79.25,24.64 0 bottom
U$59  [#DISABLE#5290]  75.18,12.45 270 top
U$60  [#DISABLE#5290]  75.18,12.45 270 bottom
U$61  [#GND#36]  90.93,10.79 270 top
U$62  [#3V3#37]  93.47,10.79 270 top
U$63  [#SDA#37]  96.01,10.79 270 top
U$64  [#SCL#38]  98.55,10.67 270 top
U$65  [PWR41]  87.12,27.18 0 top
U$66  [#LED#42]  90.04,24.64 0 bottom
U$67  [#I�C#0]  102.23,17.02 0 bottom
U$68  [HALL#EFFECT_SENSOR45]  97.28,28.45 0 top
U$69  [TMAG527346]  97.28,26.54 0 top
U$70  [#SDA#5280]  96.01,10.79 270 bottom
U$71  [#SCL#5281]  98.55,10.67 270 bottom
U$72  [#3V3#0]  93.47,10.79 270 bottom
U$73  [#GND#4]  90.93,10.79 270 bottom
U$74  [TMAG5273_HALL#EFFECT_SENSOR5]  96.65,22.1 0 bottom
U$75  [DISABLE5281]  93.47,17.27 0 top
U$76  [#INT#5285]  103.63,10.54 270 top
U$77  [#INT#5285]  103.63,10.54 270 bottom
U$78  [#INT#5289]  105.16,24.64 0 bottom
U$79  [#DISABLE#5290]  101.09,12.45 270 top
U$80  [#DISABLE#5290]  101.09,12.45 270 bottom
U$81  [#GND#36]  13.21,36.7 270 top
U$82  [#3V3#37]  15.75,36.7 270 top
U$83  [#SDA#37]  18.29,36.7 270 top
U$84  [#SCL#38]  20.83,36.58 270 top
U$85  [PWR41]  9.4,53.09 0 top
U$86  [#LED#42]  12.32,50.55 0 bottom
U$87  [#I�C#0]  24.51,42.93 0 bottom
U$88  [HALL#EFFECT_SENSOR45]  19.56,54.36 0 top
U$89  [TMAG527346]  19.56,52.45 0 top
U$90  [#SDA#5280]  18.29,36.7 270 bottom
U$91  [#SCL#5281]  20.83,36.58 270 bottom
U$92  [#3V3#0]  15.75,36.7 270 bottom
U$93  [#GND#4]  13.21,36.7 270 bottom
U$94  [TMAG5273_HALL#EFFECT_SENSOR5]  18.92,48.01 0 bottom
U$95  [DISABLE5281]  15.75,43.18 0 top
U$96  [#INT#5285]  25.91,36.45 270 top
U$97  [#INT#5285]  25.91,36.45 270 bottom
U$98  [#INT#5289]  27.43,50.55 0 bottom
U$99  [#DISABLE#5290]  23.37,38.35 270 top
U$100  [#DISABLE#5290]  23.37,38.35 270 bottom
U$101  [#GND#36]  39.12,36.7 270 top
U$102  [#3V3#37]  41.66,36.7 270 top
U$103  [#SDA#37]  44.2,36.7 270 top
U$104  [#SCL#38]  46.74,36.58 270 top
U$105  [PWR41]  35.31,53.09 0 top
U$106  [#LED#42]  38.23,50.55 0 bottom
U$107  [#I�C#0]  50.42,42.93 0 bottom
U$108  [HALL#EFFECT_SENSOR45]  45.47,54.36 0 top
U$109  [TMAG527346]  45.47,52.45 0 top
U$110  [#SDA#5280]  44.2,36.7 270 bottom
U$111  [#SCL#5281]  46.74,36.58 270 bottom
U$112  [#3V3#0]  41.66,36.7 270 bottom
U$113  [#GND#4]  39.12,36.7 270 bottom
U$114  [TMAG5273_HALL#EFFECT_SENSOR5]  44.83,48.01 0 bottom
U$115  [DISABLE5281]  41.66,43.18 0 top
U$116  [#INT#5285]  51.82,36.45 270 top
U$117  [#INT#5285]  51.82,36.45 270 bottom
U$118  [#INT#5289]  53.34,50.55 0 bottom
U$119  [#DISABLE#5290]  49.28,38.35 270 top
U$120  [#DISABLE#5290]  49.28,38.35 270 bottom
U$121  [#GND#36]  65.02,36.7 270 top
U$122  [#3V3#37]  67.56,36.7 270 top
U$123  [#SDA#37]  70.1,36.7 270 top
U$124  [#SCL#38]  72.64,36.58 270 top
U$125  [PWR41]  61.21,53.09 0 top
U$126  [#LED#42]  64.14,50.55 0 bottom
U$127  [#I�C#0]  76.33,42.93 0 bottom
U$128  [HALL#EFFECT_SENSOR45]  71.37,54.36 0 top
U$129  [TMAG527346]  71.37,52.45 0 top
U$130  [#SDA#5280]  70.1,36.7 270 bottom
U$131  [#SCL#5281]  72.64,36.58 270 bottom
U$132  [#3V3#0]  67.56,36.7 270 bottom
U$133  [#GND#4]  65.02,36.7 270 bottom
U$134  [TMAG5273_HALL#EFFECT_SENSOR5]  70.74,48.01 0 bottom
U$135  [DISABLE5281]  67.56,43.18 0 top
U$136  [#INT#5285]  77.72,36.45 270 top
U$137  [#INT#5285]  77.72,36.45 270 bottom
U$138  [#INT#5289]  79.25,50.55 0 bottom
U$139  [#DISABLE#5290]  75.18,38.35 270 top
U$140  [#DISABLE#5290]  75.18,38.35 270 bottom
U$141  [#GND#36]  90.93,36.7 270 top
U$142  [#3V3#37]  93.47,36.7 270 top
U$143  [#SDA#37]  96.01,36.7 270 top
U$144  [#SCL#38]  98.55,36.58 270 top
U$145  [PWR41]  87.12,53.09 0 top
U$146  [#LED#42]  90.04,50.55 0 bottom
U$147  [#I�C#0]  102.23,42.93 0 bottom
U$148  [HALL#EFFECT_SENSOR45]  97.28,54.36 0 top
U$149  [TMAG527346]  97.28,52.45 0 top
U$150  [#SDA#5280]  96.01,36.7 270 bottom
U$151  [#SCL#5281]  98.55,36.58 270 bottom
U$152  [#3V3#0]  93.47,36.7 270 bottom
U$153  [#GND#4]  90.93,36.7 270 bottom
U$154  [TMAG5273_HALL#EFFECT_SENSOR5]  96.65,48.01 0 bottom
U$155  [DISABLE5281]  93.47,43.18 0 top
U$156  [#INT#5285]  103.63,36.45 270 top
U$157  [#INT#5285]  103.63,36.45 270 bottom
U$158  [#INT#5289]  105.16,50.55 0 bottom
U$159  [#DISABLE#5290]  101.09,38.35 270 top
U$160  [#DISABLE#5290]  101.09,38.35 270 bottom
U$161  [#GND#36]  13.21,62.61 270 top
U$162  [#3V3#37]  15.75,62.61 270 top
U$163  [#SDA#37]  18.29,62.61 270 top
U$164  [#SCL#38]  20.83,62.48 270 top
U$165  [PWR41]  9.4,78.99 0 top
U$166  [#LED#42]  12.32,76.45 0 bottom
U$167  [#I�C#0]  24.51,68.83 0 bottom
U$168  [HALL#EFFECT_SENSOR45]  19.56,80.26 0 top
U$169  [TMAG527346]  19.56,78.36 0 top
U$170  [#SDA#5280]  18.29,62.61 270 bottom
U$171  [#SCL#5281]  20.83,62.48 270 bottom
U$172  [#3V3#0]  15.75,62.61 270 bottom
U$173  [#GND#4]  13.21,62.61 270 bottom
U$174  [TMAG5273_HALL#EFFECT_SENSOR5]  18.92,73.91 0 bottom
U$175  [DISABLE5281]  15.75,69.09 0 top
U$176  [#INT#5285]  25.91,62.36 270 top
U$177  [#INT#5285]  25.91,62.36 270 bottom
U$178  [#INT#5289]  27.43,76.45 0 bottom
U$179  [#DISABLE#5290]  23.37,64.26 270 top
U$180  [#DISABLE#5290]  23.37,64.26 270 bottom
U$181  [#GND#36]  39.12,62.61 270 top
U$182  [#3V3#37]  41.66,62.61 270 top
U$183  [#SDA#37]  44.2,62.61 270 top
U$184  [#SCL#38]  46.74,62.48 270 top
U$185  [PWR41]  35.31,78.99 0 top
U$186  [#LED#42]  38.23,76.45 0 bottom
U$187  [#I�C#0]  50.42,68.83 0 bottom
U$188  [HALL#EFFECT_SENSOR45]  45.47,80.26 0 top
U$189  [TMAG527346]  45.47,78.36 0 top
U$190  [#SDA#5280]  44.2,62.61 270 bottom
U$191  [#SCL#5281]  46.74,62.48 270 bottom
U$192  [#3V3#0]  41.66,62.61 270 bottom
U$193  [#GND#4]  39.12,62.61 270 bottom
U$194  [TMAG5273_HALL#EFFECT_SENSOR5]  44.83,73.91 0 bottom
U$195  [DISABLE5281]  41.66,69.09 0 top
U$196  [#INT#5285]  51.82,62.36 270 top
U$197  [#INT#5285]  51.82,62.36 270 bottom
U$198  [#INT#5289]  53.34,76.45 0 bottom
U$199  [#DISABLE#5290]  49.28,64.26 270 top
U$200  [#DISABLE#5290]  49.28,64.26 270 bottom
U$201  [#GND#36]  65.02,62.61 270 top
U$202  [#3V3#37]  67.56,62.61 270 top
U$203  [#SDA#37]  70.1,62.61 270 top
U$204  [#SCL#38]  72.64,62.48 270 top
U$205  [PWR41]  61.21,78.99 0 top
U$206  [#LED#42]  64.14,76.45 0 bottom
U$207  [#I�C#0]  76.33,68.83 0 bottom
U$208  [HALL#EFFECT_SENSOR45]  71.37,80.26 0 top
U$209  [TMAG527346]  71.37,78.36 0 top
U$210  [#SDA#5280]  70.1,62.61 270 bottom
U$211  [#SCL#5281]  72.64,62.48 270 bottom
U$212  [#3V3#0]  67.56,62.61 270 bottom
U$213  [#GND#4]  65.02,62.61 270 bottom
U$214  [TMAG5273_HALL#EFFECT_SENSOR5]  70.74,73.91 0 bottom
U$215  [DISABLE5281]  67.56,69.09 0 top
U$216  [#INT#5285]  77.72,62.36 270 top
U$217  [#INT#5285]  77.72,62.36 270 bottom
U$218  [#INT#5289]  79.25,76.45 0 bottom
U$219  [#DISABLE#5290]  75.18,64.26 270 top
U$220  [#DISABLE#5290]  75.18,64.26 270 bottom
U$221  [#GND#36]  90.93,62.61 270 top
U$222  [#3V3#37]  93.47,62.61 270 top
U$223  [#SDA#37]  96.01,62.61 270 top
U$224  [#SCL#38]  98.55,62.48 270 top
U$225  [PWR41]  87.12,78.99 0 top
U$226  [#LED#42]  90.04,76.45 0 bottom
U$227  [#I�C#0]  102.23,68.83 0 bottom
U$228  [HALL#EFFECT_SENSOR45]  97.28,80.26 0 top
U$229  [TMAG527346]  97.28,78.36 0 top
U$230  [#SDA#5280]  96.01,62.61 270 bottom
U$231  [#SCL#5281]  98.55,62.48 270 bottom
U$232  [#3V3#0]  93.47,62.61 270 bottom
U$233  [#GND#4]  90.93,62.61 270 bottom
U$234  [TMAG5273_HALL#EFFECT_SENSOR5]  96.65,73.91 0 bottom
U$235  [DISABLE5281]  93.47,69.09 0 top
U$236  [#INT#5285]  103.63,62.36 270 top
U$237  [#INT#5285]  103.63,62.36 270 bottom
U$238  [#INT#5289]  105.16,76.45 0 bottom
U$239  [#DISABLE#5290]  101.09,64.26 270 top
U$240  [#DISABLE#5290]  101.09,64.26 270 bottom
U$241  [#GND#36]  13.21,88.52 270 top
U$242  [#3V3#37]  15.75,88.52 270 top
U$243  [#SDA#37]  18.29,88.52 270 top
U$244  [#SCL#38]  20.83,88.39 270 top
U$245  [PWR41]  9.4,104.9 0 top
U$246  [#LED#42]  12.32,102.36 0 bottom
U$247  [#I�C#0]  24.51,94.74 0 bottom
U$248  [HALL#EFFECT_SENSOR45]  19.56,106.17 0 top
U$249  [TMAG527346]  19.56,104.27 0 top
U$250  [#SDA#5280]  18.29,88.52 270 bottom
U$251  [#SCL#5281]  20.83,88.39 270 bottom
U$252  [#3V3#0]  15.75,88.52 270 bottom
U$253  [#GND#4]  13.21,88.52 270 bottom
U$254  [TMAG5273_HALL#EFFECT_SENSOR5]  18.92,99.82 0 bottom
U$255  [DISABLE5281]  15.75,95 0 top
U$256  [#INT#5285]  25.91,88.27 270 top
U$257  [#INT#5285]  25.91,88.27 270 bottom
U$258  [#INT#5289]  27.43,102.36 0 bottom
U$259  [#DISABLE#5290]  23.37,90.17 270 top
U$260  [#DISABLE#5290]  23.37,90.17 270 bottom
U$261  [#GND#36]  39.12,88.52 270 top
U$262  [#3V3#37]  41.66,88.52 270 top
U$263  [#SDA#37]  44.2,88.52 270 top
U$264  [#SCL#38]  46.74,88.39 270 top
U$265  [PWR41]  35.31,104.9 0 top
U$266  [#LED#42]  38.23,102.36 0 bottom
U$267  [#I�C#0]  50.42,94.74 0 bottom
U$268  [HALL#EFFECT_SENSOR45]  45.47,106.17 0 top
U$269  [TMAG527346]  45.47,104.27 0 top
U$270  [#SDA#5280]  44.2,88.52 270 bottom
U$271  [#SCL#5281]  46.74,88.39 270 bottom
U$272  [#3V3#0]  41.66,88.52 270 bottom
U$273  [#GND#4]  39.12,88.52 270 bottom
U$274  [TMAG5273_HALL#EFFECT_SENSOR5]  44.83,99.82 0 bottom
U$275  [DISABLE5281]  41.66,95 0 top
U$276  [#INT#5285]  51.82,88.27 270 top
U$277  [#INT#5285]  51.82,88.27 270 bottom
U$278  [#INT#5289]  53.34,102.36 0 bottom
U$279  [#DISABLE#5290]  49.28,90.17 270 top
U$280  [#DISABLE#5290]  49.28,90.17 270 bottom
U$281  [#GND#36]  65.02,88.52 270 top
U$282  [#3V3#37]  67.56,88.52 270 top
U$283  [#SDA#37]  70.1,88.52 270 top
U$284  [#SCL#38]  72.64,88.39 270 top
U$285  [PWR41]  61.21,104.9 0 top
U$286  [#LED#42]  64.14,102.36 0 bottom
U$287  [#I�C#0]  76.33,94.74 0 bottom
U$288  [HALL#EFFECT_SENSOR45]  71.37,106.17 0 top
U$289  [TMAG527346]  71.37,104.27 0 top
U$290  [#SDA#5280]  70.1,88.52 270 bottom
U$291  [#SCL#5281]  72.64,88.39 270 bottom
U$292  [#3V3#0]  67.56,88.52 270 bottom
U$293  [#GND#4]  65.02,88.52 270 bottom
U$294  [TMAG5273_HALL#EFFECT_SENSOR5]  70.74,99.82 0 bottom
U$295  [DISABLE5281]  67.56,95 0 top
U$296  [#INT#5285]  77.72,88.27 270 top
U$297  [#INT#5285]  77.72,88.27 270 bottom
U$298  [#INT#5289]  79.25,102.36 0 bottom
U$299  [#DISABLE#5290]  75.18,90.17 270 top
U$300  [#DISABLE#5290]  75.18,90.17 270 bottom
U$301  [#GND#36]  90.93,88.52 270 top
U$302  [#3V3#37]  93.47,88.52 270 top
U$303  [#SDA#37]  96.01,88.52 270 top
U$304  [#SCL#38]  98.55,88.39 270 top
U$305  [PWR41]  87.12,104.9 0 top
U$306  [#LED#42]  90.04,102.36 0 bottom
U$307  [#I�C#0]  102.23,94.74 0 bottom
U$308  [HALL#EFFECT_SENSOR45]  97.28,106.17 0 top
U$309  [TMAG527346]  97.28,104.27 0 top
U$310  [#SDA#5280]  96.01,88.52 270 bottom
U$311  [#SCL#5281]  98.55,88.39 270 bottom
U$312  [#3V3#0]  93.47,88.52 270 bottom
U$313  [#GND#4]  90.93,88.52 270 bottom
U$314  [TMAG5273_HALL#EFFECT_SENSOR5]  96.65,99.82 0 bottom
U$315  [DISABLE5281]  93.47,95 0 top
U$316  [#INT#5285]  103.63,88.27 270 top
U$317  [#INT#5285]  103.63,88.27 270 bottom
U$318  [#INT#5289]  105.16,102.36 0 bottom
U$319  [#DISABLE#5290]  101.09,90.17 270 top
U$320  [#DISABLE#5290]  101.09,90.17 270 bottom

## Library data of the parts
C1-C16 = SparkFun-Capacitors; PROD_ID: CAP-16503
D1-D16 = SparkFun-LED; PROD_ID: DIO-17976
E$1-E$4 FD1-FD64 LOGO1-LOGO80 = SparkFun-Aesthetics
E$5 E$6 = SparkFun-Retired
H1-H64 = SparkFun-Hardware
I2C I2C1-I2C15 JP1-JP16 LED LED1-LED15 = SparkFun-Jumpers
J1 J2 J4 J5 J7 J8 J10 J11 J13 J14 J16 J17 J19 J20 J22 J23 J25 J26 J28 J29 J31 J32 J34 J35 J37 J38 J40 J41 J43 J44 J46 J47 = SparkFun-Connectors; PROD_ID: CONN-13694
J3 J6 J9 J12 J15 J18 J21 J24 J27 J30 J33 J36 J39 J42 J45 J48 = SparkFun-Connectors; PROD_ID: CONN-08437
Q1-Q16 = SparkFun-DiscreteSemi; PROD_ID: TRANS-14388
R1 R2 R5 R8 R11 R13 R16 R18 R21 R23 R26 R28 R31 R33 R36 R38 R41 R43 R46 R48 R51 R53 R56 R58 R61 R63 R66 R68 R71 R73 R76 R78 = SparkFun-Resistors; PROD_ID: RES-08272
R3 R9 R14 R19 R24 R29 R34 R39 R44 R49 R54 R59 R64 R69 R74 R79 = SparkFun-Resistors; PROD_ID: RES-07857
R4 R6 R7 R10 R12 R15 R17 R20 R22 R25 R27 R30 R32 R35 R37 R40 R42 R45 R47 R50 R52 R55 R57 R60 R62 R65 R67 R70 R72 R75 R77 R80 = SparkFun-Resistors; PROD_ID: RES-00824
S1-S16 = SparkFun-Switches; PROD_ID: SWCH-15606
U1-U16 = TMAG5273; PROD_ID: ROB-18440
U$1-U$320 = output

## Nets
3.3V: J1.2 J2.2 J3.2 Q1.2 S1.3 S1.4
3.3V1: J4.2 J5.2 J6.2 Q2.2 S2.3 S2.4
3.3V2: J7.2 J8.2 J9.2 Q3.2 S3.3 S3.4
3.3V3: J10.2 J11.2 J12.2 Q4.2 S4.3 S4.4
3.3V4: J13.2 J14.2 J15.2 Q5.2 S5.3 S5.4
3.3V5: J16.2 J17.2 J18.2 Q6.2 S6.3 S6.4
3.3V6: J19.2 J20.2 J21.2 Q7.2 S7.3 S7.4
3.3V7: J22.2 J23.2 J24.2 Q8.2 S8.3 S8.4
3.3V8: J25.2 J26.2 J27.2 Q9.2 S9.3 S9.4
3.3V9: J28.2 J29.2 J30.2 Q10.2 S10.3 S10.4
3.3V10: J31.2 J32.2 J33.2 Q11.2 S11.3 S11.4
3.3V11: J34.2 J35.2 J36.2 Q12.2 S12.3 S12.4
3.3V12: J37.2 J38.2 J39.2 Q13.2 S13.3 S13.4
3.3V13: J40.2 J41.2 J42.2 Q14.2 S14.3 S14.4
3.3V14: J43.2 J44.2 J45.2 Q15.2 S15.3 S15.4
3.3V15: J46.2 J47.2 J48.2 Q16.2 S16.3 S16.4
3.3V_SW: C1.1 I2C.2 JP2.2 Q1.3 R3.2 U1.4
3.3V_SW1: C2.1 I2C1.2 JP1.2 Q2.3 R9.2 U2.4
3.3V_SW2: C3.1 I2C2.2 JP3.2 Q3.3 R14.2 U3.4
3.3V_SW3: C4.1 I2C3.2 JP4.2 Q4.3 R19.2 U4.4
3.3V_SW4: C5.1 I2C4.2 JP5.2 Q5.3 R24.2 U5.4
3.3V_SW5: C6.1 I2C5.2 JP6.2 Q6.3 R29.2 U6.4
3.3V_SW6: C7.1 I2C6.2 JP7.2 Q7.3 R34.2 U7.4
3.3V_SW7: C8.1 I2C7.2 JP8.2 Q8.3 R39.2 U8.4
3.3V_SW8: C9.1 I2C8.2 JP9.2 Q9.3 R44.2 U9.4
3.3V_SW9: C10.1 I2C9.2 JP10.2 Q10.3 R49.2 U10.4
3.3V_SW10: C11.1 I2C10.2 JP11.2 Q11.3 R54.2 U11.4
3.3V_SW11: C12.1 I2C11.2 JP12.2 Q12.3 R59.2 U12.4
3.3V_SW12: C13.1 I2C12.2 JP13.2 Q13.3 R64.2 U13.4
3.3V_SW13: C14.1 I2C13.2 JP14.2 Q14.3 R69.2 U14.4
3.3V_SW14: C15.1 I2C14.2 JP15.2 Q15.3 R74.2 U15.4
3.3V_SW15: C16.1 I2C15.2 JP16.2 Q16.3 R79.2 U16.4
!INT: J3.6 R4.1 U1.5
!INT1: J6.6 R6.1 U2.5
!INT2: J9.6 R12.1 U3.5
!INT3: J12.6 R17.1 U4.5
!INT4: J15.6 R22.1 U5.5
!INT5: J18.6 R27.1 U6.5
!INT6: J21.6 R32.1 U7.5
!INT7: J24.6 R37.1 U8.5
!INT8: J27.6 R42.1 U9.5
!INT9: J30.6 R47.1 U10.5
!INT10: J33.6 R52.1 U11.5
!INT11: J36.6 R57.1 U12.5
!INT12: J39.6 R62.1 U13.5
!INT13: J42.6 R67.1 U14.5
!INT14: J45.6 R72.1 U15.5
!INT15: J48.6 R77.1 U16.5
DISABLE: J3.5 Q1.1 R7.2 S1.1 S1.2
DISABLE1: J6.5 Q2.1 R10.2 S2.1 S2.2
DISABLE2: J9.5 Q3.1 R15.2 S3.1 S3.2
DISABLE3: J12.5 Q4.1 R20.2 S4.1 S4.2
DISABLE4: J15.5 Q5.1 R25.2 S5.1 S5.2
DISABLE5: J18.5 Q6.1 R30.2 S6.1 S6.2
DISABLE6: J21.5 Q7.1 R35.2 S7.1 S7.2
DISABLE7: J24.5 Q8.1 R40.2 S8.1 S8.2
DISABLE8: J27.5 Q9.1 R45.2 S9.1 S9.2
DISABLE9: J30.5 Q10.1 R50.2 S10.1 S10.2
DISABLE10: J33.5 Q11.1 R55.2 S11.1 S11.2
DISABLE11: J36.5 Q12.1 R60.2 S12.1 S12.2
DISABLE12: J39.5 Q13.1 R65.2 S13.1 S13.2
DISABLE13: J42.5 Q14.1 R70.2 S14.1 S14.2
DISABLE14: J45.5 Q15.1 R75.2 S15.1 S15.2
DISABLE15: J48.5 Q16.1 R80.2 S16.1 S16.2
GND: C1.2 J1.1 J2.1 J3.1 LED.1 R7.1 U1.2 U1.3
GND1: C2.2 J4.1 J5.1 J6.1 LED1.1 R10.1 U2.2 U2.3
GND2: C3.2 J7.1 J8.1 J9.1 LED2.1 R15.1 U3.2 U3.3
GND3: C4.2 J10.1 J11.1 J12.1 LED3.1 R20.1 U4.2 U4.3
GND4: C5.2 J13.1 J14.1 J15.1 LED4.1 R25.1 U5.2 U5.3
GND5: C6.2 J16.1 J17.1 J18.1 LED5.1 R30.1 U6.2 U6.3
GND6: C7.2 J19.1 J20.1 J21.1 LED6.1 R35.1 U7.2 U7.3
GND7: C8.2 J22.1 J23.1 J24.1 LED7.1 R40.1 U8.2 U8.3
GND8: C9.2 J25.1 J26.1 J27.1 LED8.1 R45.1 U9.2 U9.3
GND9: C10.2 J28.1 J29.1 J30.1 LED9.1 R50.1 U10.2 U10.3
GND10: C11.2 J31.1 J32.1 J33.1 LED10.1 R55.1 U11.2 U11.3
GND11: C12.2 J34.1 J35.1 J36.1 LED11.1 R60.1 U12.2 U12.3
GND12: C13.2 J37.1 J38.1 J39.1 LED12.1 R65.1 U13.2 U13.3
GND13: C14.2 J40.1 J41.1 J42.1 LED13.1 R70.1 U14.2 U14.3
GND14: C15.2 J43.1 J44.1 J45.1 LED14.1 R75.1 U15.2 U15.3
GND15: C16.2 J46.1 J47.1 J48.1 LED15.1 R80.1 U16.2 U16.3
N$1: D1.C LED.2
N$2: I2C.3 R2.2
N$3: D2.A R9.1
N$4: D1.A R3.1
N$5: JP2.1 R4.2
N$6: I2C.1 R5.2
N$7: D2.C LED1.2
N$8: JP1.1 R6.2
N$9: I2C1.3 R1.2
N$10: I2C1.1 R8.2
N$11: D3.A R14.1
N$12: D3.C LED2.2
N$13: JP3.1 R12.2
N$14: I2C2.3 R11.2
N$15: I2C2.1 R13.2
N$16: D4.A R19.1
N$17: D4.C LED3.2
N$18: JP4.1 R17.2
N$19: I2C3.3 R16.2
N$20: I2C3.1 R18.2
N$21: D5.A R24.1
N$22: D5.C LED4.2
N$23: JP5.1 R22.2
N$24: I2C4.3 R21.2
N$25: I2C4.1 R23.2
N$26: D6.A R29.1
N$27: D6.C LED5.2
N$28: JP6.1 R27.2
N$29: I2C5.3 R26.2
N$30: I2C5.1 R28.2
N$31: D7.A R34.1
N$32: D7.C LED6.2
N$33: JP7.1 R32.2
N$34: I2C6.3 R31.2
N$35: I2C6.1 R33.2
N$36: D8.A R39.1
N$37: D8.C LED7.2
N$38: JP8.1 R37.2
N$39: I2C7.3 R36.2
N$40: I2C7.1 R38.2
N$41: D9.A R44.1
N$42: D9.C LED8.2
N$43: JP9.1 R42.2
N$44: I2C8.3 R41.2
N$45: I2C8.1 R43.2
N$46: D10.A R49.1
N$47: D10.C LED9.2
N$48: JP10.1 R47.2
N$49: I2C9.3 R46.2
N$50: I2C9.1 R48.2
N$51: D11.A R54.1
N$52: D11.C LED10.2
N$53: JP11.1 R52.2
N$54: I2C10.3 R51.2
N$55: I2C10.1 R53.2
N$56: D12.A R59.1
N$57: D12.C LED11.2
N$58: JP12.1 R57.2
N$59: I2C11.3 R56.2
N$60: I2C11.1 R58.2
N$61: D13.A R64.1
N$62: D13.C LED12.2
N$63: JP13.1 R62.2
N$64: I2C12.3 R61.2
N$65: I2C12.1 R63.2
N$66: D14.A R69.1
N$67: D14.C LED13.2
N$68: JP14.1 R67.2
N$69: I2C13.3 R66.2
N$70: I2C13.1 R68.2
N$71: D15.A R74.1
N$72: D15.C LED14.2
N$73: JP15.1 R72.2
N$74: I2C14.3 R71.2
N$75: I2C14.1 R73.2
N$76: D16.A R79.1
N$77: D16.C LED15.2
N$78: JP16.1 R77.2
N$79: I2C15.3 R76.2
N$80: I2C15.1 R78.2
SCL: J1.4 J2.4 J3.4 R5.1 U1.1
SCL1: J4.4 J5.4 J6.4 R8.1 U2.1
SCL2: J7.4 J8.4 J9.4 R13.1 U3.1
SCL3: J10.4 J11.4 J12.4 R18.1 U4.1
SCL4: J13.4 J14.4 J15.4 R23.1 U5.1
SCL5: J16.4 J17.4 J18.4 R28.1 U6.1
SCL6: J19.4 J20.4 J21.4 R33.1 U7.1
SCL7: J22.4 J23.4 J24.4 R38.1 U8.1
SCL8: J25.4 J26.4 J27.4 R43.1 U9.1
SCL9: J28.4 J29.4 J30.4 R48.1 U10.1
SCL10: J31.4 J32.4 J33.4 R53.1 U11.1
SCL11: J34.4 J35.4 J36.4 R58.1 U12.1
SCL12: J37.4 J38.4 J39.4 R63.1 U13.1
SCL13: J40.4 J41.4 J42.4 R68.1 U14.1
SCL14: J43.4 J44.4 J45.4 R73.1 U15.1
SCL15: J46.4 J47.4 J48.4 R78.1 U16.1
SDA: J1.3 J2.3 J3.3 R2.1 U1.6
SDA1: J4.3 J5.3 J6.3 R1.1 U2.6
SDA2: J7.3 J8.3 J9.3 R11.1 U3.6
SDA3: J10.3 J11.3 J12.3 R16.1 U4.6
SDA4: J13.3 J14.3 J15.3 R21.1 U5.6
SDA5: J16.3 J17.3 J18.3 R26.1 U6.6
SDA6: J19.3 J20.3 J21.3 R31.1 U7.6
SDA7: J22.3 J23.3 J24.3 R36.1 U8.6
SDA8: J25.3 J26.3 J27.3 R41.1 U9.6
SDA9: J28.3 J29.3 J30.3 R46.1 U10.6
SDA10: J31.3 J32.3 J33.3 R51.1 U11.6
SDA11: J34.3 J35.3 J36.3 R56.1 U12.6
SDA12: J37.3 J38.3 J39.3 R61.1 U13.6
SDA13: J40.3 J41.3 J42.3 R66.1 U14.6
SDA14: J43.3 J44.3 J45.3 R71.1 U15.6
SDA15: J46.3 J47.3 J48.3 R76.1 U16.6